# Altium PCB Node_PCB_V2.PcbDoc
Units mm, origin at the board's own origin, x right, y up, seen from the top; angles counter-clockwise.
Board outline 82.25 x 80.25 mm, 2 copper layers (Top Layer, Bottom Layer); 53 components, 55 nets, 202 pads, 35 vias.
Unrouted connection lines stored in the file: 1.
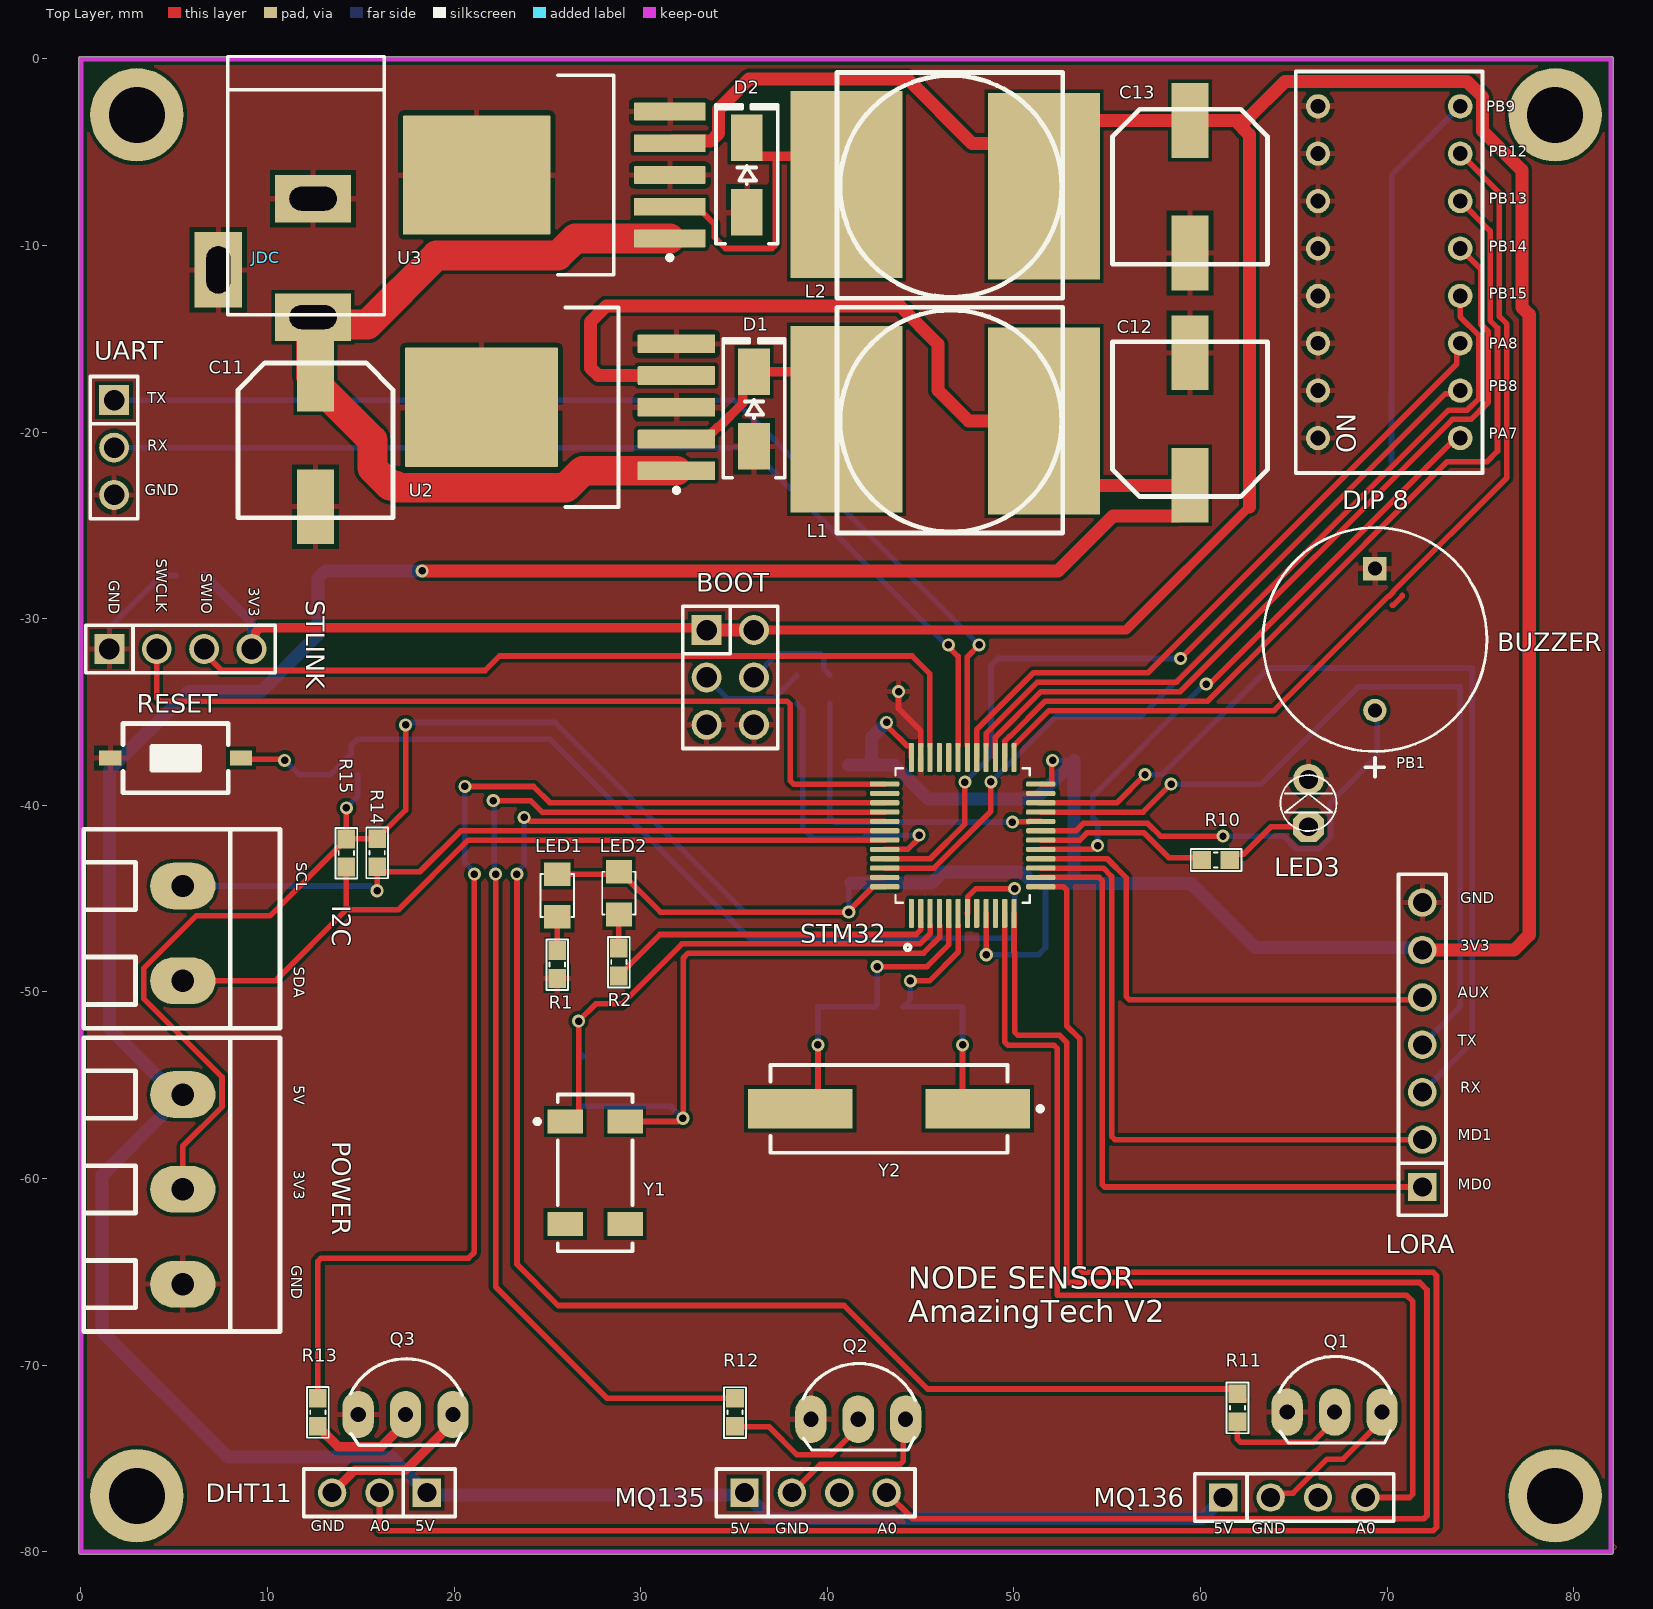
[diagram p0: Top Layer view]
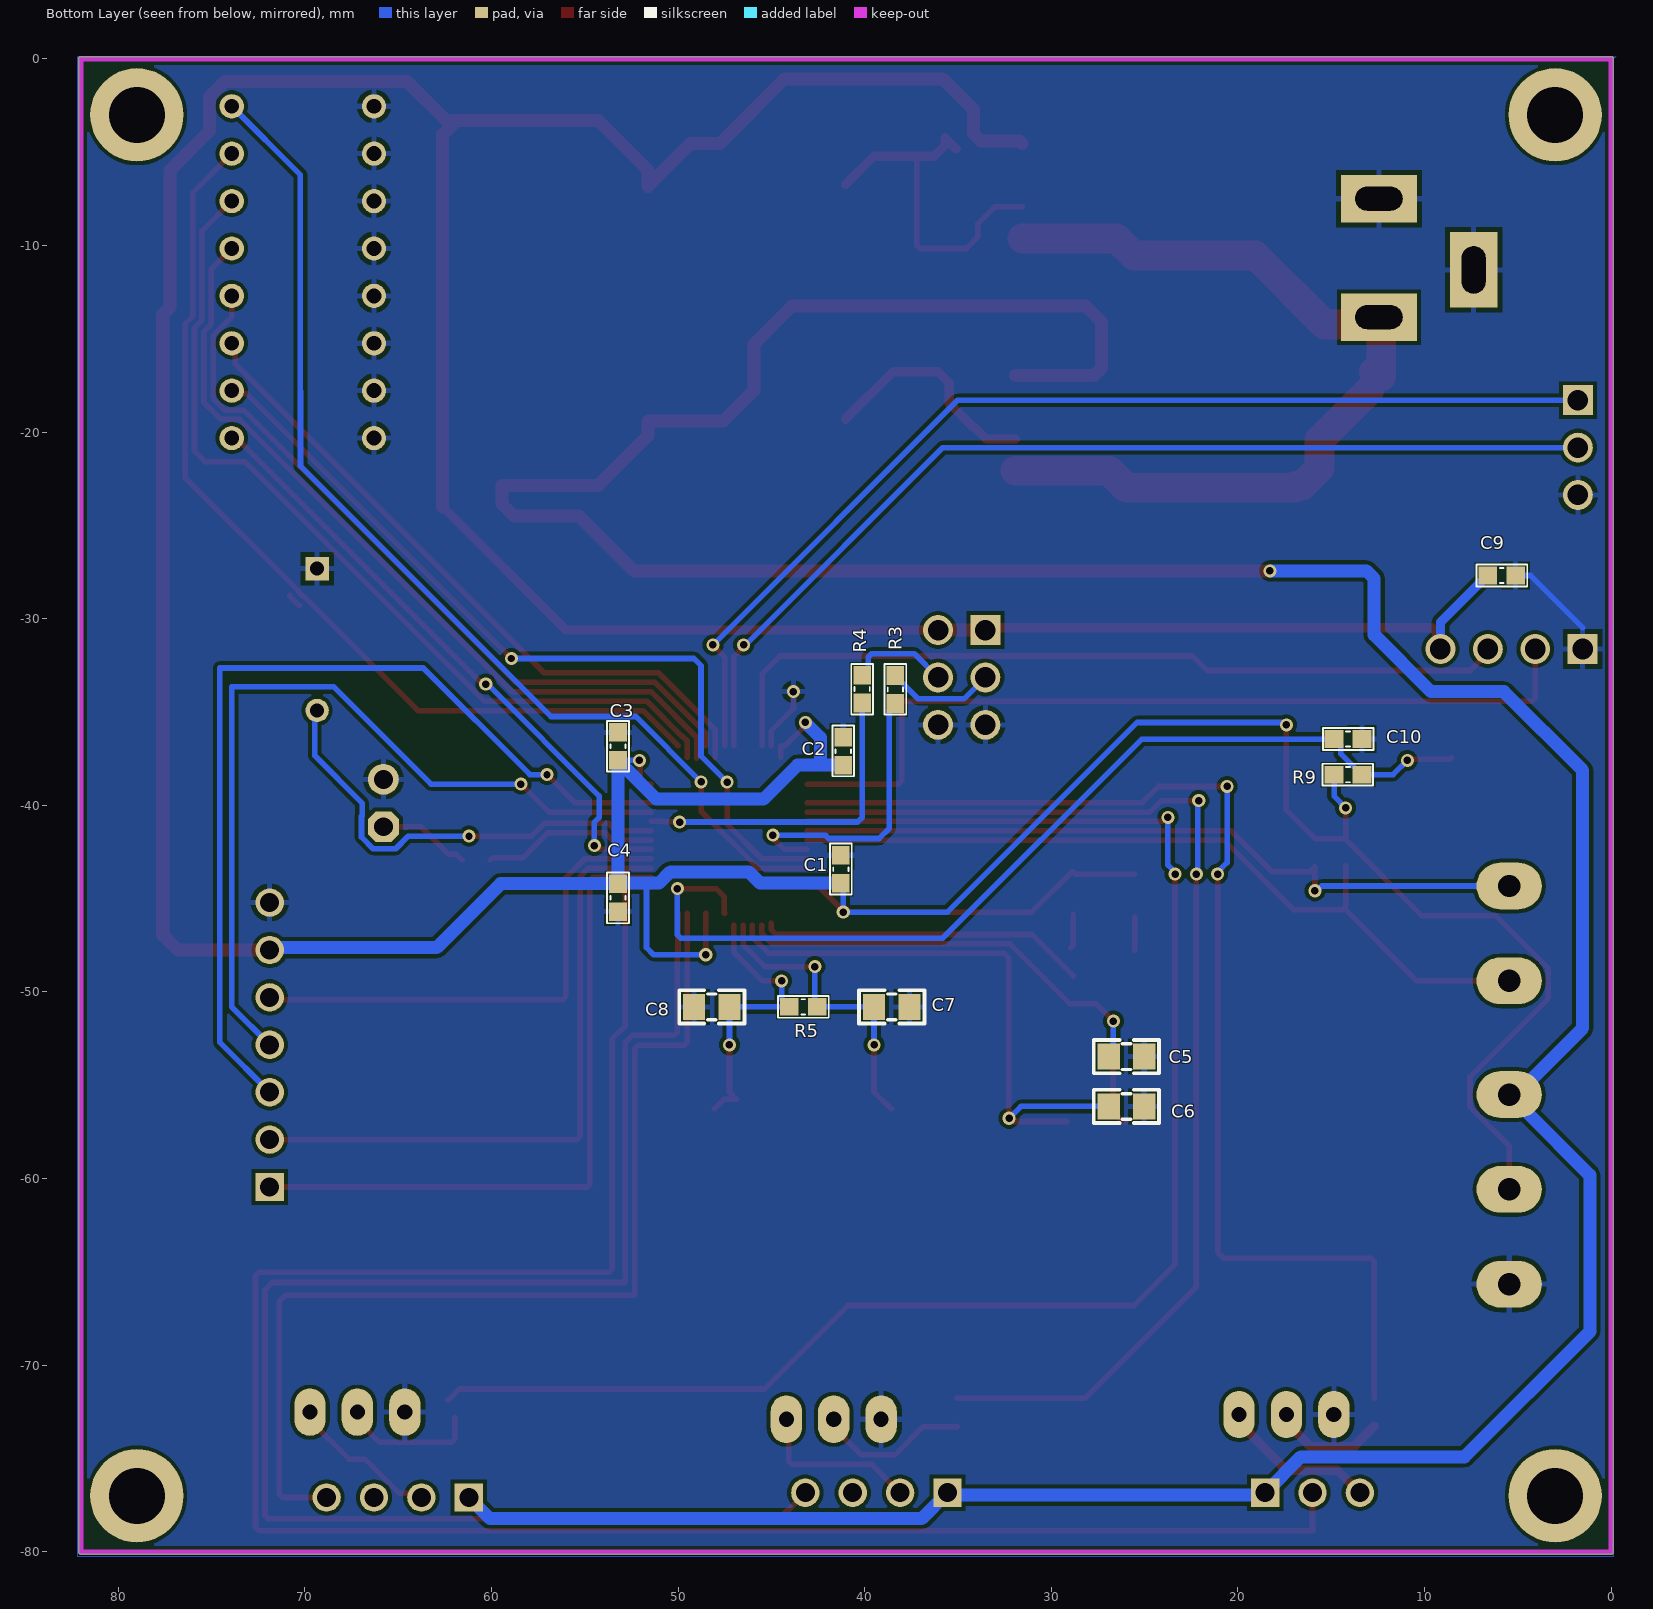
[diagram p1: Bottom Layer view, seen from below]

## Layer stack, top to bottom
Top Solder: solder mask 0.0102, Solder Resist, Dk 3.5
Top Layer: signal copper 0.0356
Dielectric 1: dielectric 0.32, FR-4, Dk 4.8
Bottom Layer: signal copper 0.0356
Bottom Solder: solder mask 0.0102, Solder Resist, Dk 3.5

## Board outline
0,-80.127 cw(c0,-80) -0.127,-80 -0.127,0 cw(c0,0) 0,0.127 82,0.127 cw(c82,0) 82.127,0 82.127,-80 cw(c82,-80) 82,-80.127

## Design rules (kind name [scope] priority, off if disabled: settings)
Clearance [All] p1: gap=0.2 ignorepadtopadclearanceinfootprint=FALSE
PolygonConnect [All] p1: connectstyle=Relief reliefconductorwidth=0.3 reliefentries=4 polygonreliefangle="90 Angle" airgapwidth=0.254
RoutingVias RoutingVias_1 [All] p1: holewidth=0.4 width=0.7 viastyle="Through Hole" minholewidth=0.4 minwidth=0.7 maxholewidth=0.4 maxwidth=0.7
SolderMaskExpansion [All] p1: expansion=0.102 istentingtop=FALSE
Width GND [InNet('GND')] p1: maxlimit=1.6 minlimit=0.3 preferedwidth=1.2
Width 3V3 [InNet('3V3')] p2: maxlimit=1.6 minlimit=0.3 preferedwidth=0.3
Width 5V [InNet('5V')] p3: maxlimit=1.6 minlimit=0.3 preferedwidth=0.3
Width 12V [InNet('12V')] p4: maxlimit=2 minlimit=1.2 preferedwidth=1.6
Width [All] p5: maxlimit=0.5 minlimit=0.3 preferedwidth=0.5
30 further rules are at their usual default settings.

## Components (designator, comment, footprint, x,y, rotation, side; value= is the part's Value field where it differs from the comment)
BOOT "Header 3X2" "JP 2x3 DT" 34.798,-33.147 r270 top (schematic designator P1)
BUZZER "Buzzer" FP-MCKPX-G1203A-K4056-MFG 69.342,-31.115 r270 top (schematic designator LS1)
C1 "104" "tu 0603" 41.275,-43.422 r90 bottom
C2 "104" "tu 0603" 41.148,-37.096 r90 bottom
C3 "104" "tu 0603" 53.213,-36.842 r90 bottom
C4 "104" "tu 0603" 53.213,-44.946 r270 bottom
C5 "20pF" "tu 0805" 25.978,-53.464 r180 bottom
C6 "20pF" "tu 0805" 25.978,-56.131 r180 bottom
C7 "20pF" "tu 0805" 38.551,-50.797 r180 bottom
C8 "20pF" "tu 0805" 48.19,-50.803 r0 bottom
C9 "104, 0603" "tu 0603" 5.867,-27.686 r180 bottom
C10 "105, 0603" "tu 0603" 14.097,-36.449 r180 bottom
C11 "100uF" "tu nhom 8 (f)" 12.573,-20.441 r270 top
C12 "100uF" "tu nhom 8 (f)" 59.436,-19.304 r90 top
C13 "100uF" "tu nhom 8 (f)" 59.436,-6.852 r270 top
D1 "SS34" "DIODE SMA" 36.068,-18.764 r90 top
D2 "SS34" "DIODE SMA" 35.687,-6.223 r90 top
DHT11 "DHT11" "JP 1x3 CT" 18.542,-76.835 r180 top (schematic designator JP3)
"DIP 8" "418117270908" 418117270908 70.104,-11.43 r90 top (schematic designator SW1)
I2C "KF128-2P" KF128-5.08-2P 5.461,-44.323 r270 top (schematic designator J1)
JDC "Jac DC" DC-IN 9.906,-10.668 r270 top
L1 "100uH - 3A SMD" "Cuon Cam 12x12x10" 52.621,-25.404 r90 top
L2 "100uH - 3A SMD" "Cuon Cam 12x12x10" 52.621,-12.831 r90 top
LED1 "LED 0805" LED-0805-Red 25.527,-43.688 r270 top
LED2 "LED 0805" LED-0805-Green 28.829,-43.561 r270 top
LED3 "LED 3mm" LED-3MM-RED 65.786,-41.148 r90 top
LORA "LORA" "JP 1x7 CT" 71.882,-60.452 r90 top (schematic designator JP5)
MQ135 "MQ136" "JP 1x4 CT" 35.56,-76.835 r0 top (schematic designator JP2)
MQ136 "MQ135" "JP 1x4 CT" 61.214,-77.089 r0 top (schematic designator JP1)
POWER "KF128-3P" KF128-5.08-3P 5.461,-55.499 r270 top (schematic designator J2)
Q1 "?" TO92 67.183,-72.517 r0 top value=C9014
Q2 "?" TO92 41.656,-72.898 r0 top value=C9014
Q3 "?" TO92 17.399,-72.644 r0 top value=C9014
R1 "510R" "tro smd 0603" 25.527,-48.526 r270 top
R2 "510R" "tro smd 0603" 28.829,-48.399 r270 top
R3 "100k" "tro smd 0603" 38.354,-33.794 r90 bottom
R4 "100k" "tro smd 0603" 40.132,-33.77 r270 bottom
R5 "1M" "tro smd 0603" 43.295,-50.8 r180 bottom
R9 "10k, 0603" "tro smd 0603" 14.097,-38.354 r0 bottom
R10 "510R" "tro smd 0603" 60.821,-42.926 r0 top
R11 "220R" "tro smd 0603" 61.976,-72.275 r270 top
R12 "220R" "tro smd 0603" 35.052,-72.529 r270 top
R13 "220R" "tro smd 0603" 12.7,-72.517 r270 top
R14 "1.5k" "tro smd 0603" 15.875,-42.533 r270 top
R15 "1.5k" "tro smd 0603" 14.224,-42.557 r270 top
RESET "Nut Nhan 2 Chan SMD 3x6x2.5" "Nut Nhan 2 Chan SMD 3x6x2.5" 5.08,-37.465 r0 top (schematic designator BT1)
STLINK "SWD" "JP 1x4 DT" 1.524,-31.623 r0 top (schematic designator P2)
STM32 "STM32F103C8T6" QFP50P900X900X160-48N 47.255,-41.612 r90 top (schematic designator U1)
U2 "LM2576S-5.0/NOPB" KTT0005B_N 25.663,-18.669 r180 top
U3 "LM2576SX-3.3/NOPB" KTT0005B_L 25.359,-6.223 r180 top
UART "UART" "JP 1x3 DT" 1.778,-18.288 r270 top (schematic designator JP4)
Y1 "32.768K" FP-ABS25-MFG 27.559,-59.69 r270 top
Y2 "8MHz" ABRA-ABLS-14.7456MHZ-B2-T_V 43.307,-56.261 r180 top

## Footprints (in the part's own frame and the unit in brackets; to place one, negate y for a bottom-side part, rotate by r counter-clockwise, add the part's x,y. Pads: shape width x height; smd on the part's side, far side on the other; paste and mask are expansions set on the pad)
418117270908 [mm] "2.54 mm compact THT with raised actuator, 8p"
  round 1.3 hole 0.8: 1(-8.89,-3.81) 2(-6.35,-3.81) 3(-3.81,-3.81) 4(-1.27,-3.81) 5(1.27,-3.81) 6(3.81,-3.81) 7(6.35,-3.81) 8(8.89,-3.81) 9(8.89,3.81) 10(6.35,3.81) 11(3.81,3.81) 12(1.27,3.81) 13(-1.27,3.81) 14(-3.81,3.81) 15(-6.35,3.81) 16(-8.89,3.81)
  silkscreen extent -10.76,-5 10.76,5, body extent -10.66,-4.95 10.66,4.95, height 6.9
ABRA-ABLS-14.7456MHZ-B2-T_V [mm] "SMD, 2-Leads, Body 11.4x4.7mm"
  rect 5.6x2.1 smd: 1(-4.75,0) 2(4.75,0)
  silkscreen extent -8.23,-2.35 6.35,2.35, body extent -6.35,-2.35 6.35,2.35, height 4.16
"Cuon Cam 12x12x10" [mm] "Cuon Cam 12x12x10"
  rect 10x6 smd: 1(6.1,11.6) 2(6,1)
  silkscreen extent 0,0 12.1,12.1, body extent 0.1,-0.2 12.1,12.14, height 7.51
DC-IN [mil] "Jac DC input"
  rect 100x160 hole 50 slot 100 at 90 deg: 1(125,100) 2(-125,100)
  rect 160x100 hole 50 slot 100 at 0 deg: 3(25,-100)
  silkscreen extent -425,-80 120,250, body extent -410,-105 134,269, height 434
"DIODE SMA" [mm] "SMA"
  rect 2.5x1.7 smd: 1(-2,0) 2(2,0)
  silkscreen extent -3.68,-1.65 3.75,1.65, body extent -2.6,-1.37 2.6,1.37, height 2.4
FP-ABS25-MFG [mm]
  rect 1.3x1.9 smd paste+0 mask+0: 1(-2.75,-1.6) 2(2.75,-1.6) 3(2.75,1.6) 4(-2.75,1.6)
  silkscreen extent -4.2,-3.22 4.2,2, body extent -4.3,-2.65 4.3,2.65, height 0.25
FP-MCKPX-G1203A-K4056-MFG [mm]
  rect 1.25x1.25 hole 0.75 paste-1000 mask+0: 1(-3.8,0)
  round 1.25 hole 0.75 paste-1000 mask+0: 2(3.8,0)
  silkscreen extent -6,-6 7.35,6, body extent -6.1,-6.1 6.1,6.1, height 0.25
"JP 1x3 CT" [mm]
  rect 1.52x1.52 hole 1.02: 1(0,0)
  round 1.52 hole 1.02: 2(2.54,0) 3(5.08,0)
  silkscreen extent -1.52,-1.27 6.6,1.27, body extent -1.52,-1.25 6.6,1.25, height 8.51
"JP 1x3 DT" [mm]
  rect 1.6x1.6 hole 1.1: 1(0,0)
  round 1.6 hole 1.1: 2(2.54,0) 3(5.08,0)
  silkscreen extent -1.27,-1.27 6.35,1.27, body extent -1.27,-1.27 6.35,1.27, height 8.54
"JP 1x4 CT" [mm]
  rect 1.52x1.52 hole 1.02: 1(0,0)
  round 1.52 hole 1.02: 2(2.54,0) 3(5.08,0) 4(7.62,0)
  silkscreen extent -1.52,-1.27 9.14,1.27, body extent -1.52,-1.25 9.14,1.25, height 8.51
"JP 1x4 DT" [mm] "4 pins, 1 row, straight, gold plating"
  rect 1.6x1.6 hole 1.1: 1(0,0)
  round 1.6 hole 1.1: 2(2.54,0) 3(5.08,0) 4(7.62,0)
  silkscreen extent -1.27,-1.27 8.89,1.27, body extent -1.27,-1.27 8.89,1.27, height 8.54
"JP 1x7 CT" [mm] "7 row, straight, gold plating"
  rect 1.52x1.52 hole 1.02: 1(0,0)
  round 1.52 hole 1.02: 2(2.54,0) 3(5.08,0) 4(7.62,0) 5(10.16,0) 6(12.7,0) 7(15.24,0)
  silkscreen extent -1.52,-1.27 16.76,1.27, body extent -1.52,-1.25 16.76,1.25, height 8.51
"JP 2x3 DT" [mm]
  rect 1.6x1.6 hole 1.1: 1(-2.54,-1.27)
  round 1.6 hole 1.1: 2(0,-1.27) 3(2.54,-1.27) 4(2.54,1.27) 5(0,1.27) 6(-2.54,1.27)
  silkscreen extent -3.81,-2.54 3.81,2.54, body extent -3.81,-2.54 3.81,2.54, height 8.55
KF128-5.08-2P [mm] "ÂÝ¶¤Ê½½ÓÏß¶Ë×Ó£¬½Å¾à5.08mm"
  oval 2.5x3.5 hole 1.2: 1(0,0) 2(5.08,0)
  silkscreen extent -3.05,-5.31 7.62,5.21, body extent -3.05,-5.38 7.61,5.12, height 14.15
KF128-5.08-3P [mm] "ÂÝ¶¤Ê½½ÓÏß¶Ë×Ó£¬½Å¾à5.08mm"
  oval 2.5x3.5 hole 1.2: 1(0,0) 2(5.08,0) 3(10.16,0)
  silkscreen extent -3.05,-5.31 12.7,5.21, body extent -3.05,-5.38 12.69,5.12, height 14.15
KTT0005B_L [mm] "DPAK, 5-Leads, Body 10.65x9.65mm, Pitch 1.7mm, IPC High Density"
  rrect11% 3.85x0.95 smd: 1(-6.2,3.4) 2(-6.2,1.7) 3(-6.2,0) 4(-6.2,-1.7) 5(-6.2,-3.4)
  rrect2% 7.9x6.4 smd: 6(4.15,0)
  silkscreen extent -6.33,-5.35 -0.2,5.35, body extent -3.2,-5.32 6.45,5.33, height 4.83
KTT0005B_N [mm] "DPAK, 5-Leads, Body 10.65x9.65mm, Pitch 1.7mm, IPC Medium Density"
  rrect10% 4.15x1 smd: 1(-6.25,3.4) 2(-6.25,1.7) 3(-6.25,0) 4(-6.25,-1.7) 5(-6.25,-3.4)
  rrect2% 8.2x6.4 smd: 6(4.2,0)
  silkscreen extent -6.38,-5.35 -0.3,5.35, body extent -3.15,-5.32 6.5,5.33, height 4.83
LED-3MM-RED [mil]
  oct 65x65 hole 40: 1(0,0)
  round 65 hole 40: 2(100,0)
  silkscreen extent -9,-59 109,59, body extent -27,-77 117,80, height 181
LED-0805-Green [mil]
  rect 50x55 smd: 1(0,0) 2(90,0)
  silkscreen extent 0,-35 90,35, body extent 5,-25 85,25, height 43
LED-0805-Red [mil]
  rect 50x55 smd: 1(0,0) 2(90,0)
  silkscreen extent 0,-35 90,35, body extent 5,-25 85,25, height 43
"Nut Nhan 2 Chan SMD 3x6x2.5" [mm] "Switch SMD type"
  rect 1.2x0.8 smd: 1(-3.5,0) 2(3.5,0)
  silkscreen extent -2.82,-1.85 2.82,1.85, body extent -3.05,-1.85 3.05,1.85, height 2.5
QFP50P900X900X160-48N [mm]
  rrect50% 1.56x0.28 smd: 1(-4.18,2.75) 2(-4.18,2.25) 3(-4.18,1.75) 4(-4.18,1.25) 5(-4.18,0.75) 6(-4.18,0.25) 7(-4.18,-0.25) 8(-4.18,-0.75) 9(-4.18,-1.25) 10(-4.18,-1.75) 11(-4.18,-2.25) 12(-4.18,-2.75) 25(4.18,-2.75) 26(4.18,-2.25) 27(4.18,-1.75) 28(4.18,-1.25) 29(4.18,-0.75) 30(4.18,-0.25) 31(4.18,0.25) 32(4.18,0.75) 33(4.18,1.25) 34(4.18,1.75) 35(4.18,2.25) 36(4.18,2.75)
  rrect50% 0.28x1.56 smd: 13(-2.75,-4.18) 14(-2.25,-4.18) 15(-1.75,-4.18) 16(-1.25,-4.18) 17(-0.75,-4.18) 18(-0.25,-4.18) 19(0.25,-4.18) 20(0.75,-4.18) 21(1.25,-4.18) 22(1.75,-4.18) 23(2.25,-4.18) 24(2.75,-4.18) 37(2.75,4.18) 38(2.25,4.18) 39(1.75,4.18) 40(1.25,4.18) 41(0.75,4.18) 42(0.25,4.18) 43(-0.25,4.18) 44(-0.75,4.18) 45(-1.25,4.18) 46(-1.75,4.18) 47(-2.25,4.18) 48(-2.75,4.18)
  silkscreen extent -6.15,-3.6 3.6,3.6, body extent -4.5,-4.5 4.5,4.5, height 1.6
TO92 [mil] "TO-92"
  oval 66x100 hole 32: 1(-100,0) 2(0,0) 3(100,0)
  silkscreen extent -117,-65 120,118, body extent -109,-66 109,95, height 245
"tro smd 0603" [mm] "Chip Capacitor, 2-Leads, Body 1,60x0,80mm, IPC Medium Density"
  rect 1x0.95 smd mask+0.076: 1(-0.75,0) 2(0.75,0)
  silkscreen extent -1.35,-0.58 1.37,0.58, body extent -0.82,-0.42 0.82,0.43, height 0.44
"tu 0603" [mm] "Chip Capacitor, 2-Leads, Body 1,60x0,80mm, IPC Medium Density"
  rect 1x0.95 smd mask+0.076: 1(-0.75,0) 2(0.75,0)
  silkscreen extent -1.35,-0.58 1.37,0.58, body extent -0.8,-0.4 0.8,0.4, height 0.9
"tu 0805" [mm] "Compoment SMD 80x50mil"
  rect 1.2x1.4 smd: 1(-0.946,-0.003) 2(0.954,-0.003)
  silkscreen extent -1.75,-0.89 1.75,0.89, body extent -1.01,-0.64 1.01,0.63, height 0.61
"tu nhom 8 (f)" [mm]
  rect 4x2 smd: 1(-3.55,0) 2(3.55,0)
  silkscreen extent -4.15,-4.15 4.15,4.15, body extent -4.85,-4.25 4.85,4.25, height 10.5

## Part data
BOOT: library part "JP 2x3 2.54 Duc Thang", "Cắm", Chung_Loai=Cắm, Don_Vi=Con, Ma_Hang=MH002686, Ten_Linh_Kien="Jump Đôi Đực 2.54MM 2x40P Thẳng 11MM"
BUZZER: library part CMP-12433-000001-1, "MAGNETIC BUZZER AND TRANSDUCER - More Details", Current=30mA, Frequency=2300Hz, Manufacturer="Multicomp Pro", Manufacturer Part Number=MCKPX-G1203A-K4056, Max Supply Voltage=5V, Min Supply Voltage=2V, Operating Supply Voltage=3V, Package=0, Temperature="-20°C to +70°C", Temperature Range High=+70°C, Temperature Range Low=-20°C, Automotive=No, Category=Speak, ComponentLink2Description=Datasheet, ComponentLink2URL=http://www.farnell.com/datasheets/1498149.pdf?_ga=2.17855225.1157923166.1572356775-536200964.1569240579, Device Class L1=Electromechanical, Device Class L2="Audio Products", Device Class L3=Buzzers, Height=9.5mm, Lead Free=Yes, Octopart=https://octopart.com/mckpx-g1203a-k4056-multicomp-12157154, RoHS=TRUE, Standoff Height=0.5mm
C1 C2 C3 C4 C9: library part "Tu 0603 104 50V 10%", "Dán", Chung_Loai=Dán, Don_Vi=Con, Ma_Hang=MH004568, So_Chan=2, Ten_Linh_Kien="Tụ 0603 104-100nF 10% 50V"
C5 C6 C7 C8: library part "Tu 0805 20pF 50V 10%", "Dán", Chung_Loai=Dán, Don_Vi=Con, Ma_Hang=MH004558, So_Chan=2, Ten_Linh_Kien="Tụ 0805 20P 10% 50V"
C10: library part "Tu 0603 105 16V 20%", "Dán", Chung_Loai=Dán, Don_Vi=Con, Ma_Hang=MH004574, So_Chan=2, Ten_Linh_Kien="Tụ 0603 105-1uF 20% 16V"
C11 C12 C13: library part "Tu Nhom 100uF 50V", "Dán", Chung_Loai=Dán, Don_Vi=Con, Ma_Hang=MH002223, So_Chan=2, Ten_Linh_Kien="Tụ Nhôm 100uF 50V 8x10.2MM"
D1 D2: library part "Diode SS34 ( 1N5822 )", "Dán", Chung_Loai=Dán, Don_Vi=Con, Ma_Hang=MH002104, Ten_Linh_Kien="Diode SS34 3A 40V SMA ( 1N5822 SS34A)"
DHT11: library part "JP 1x3 2.54 Cai Thang", "Cắm", Chung_Loai=Cắm, Don_Vi=Con, Ma_Hang=MH004006, Ten_Linh_Kien="Jump Đơn Cái 2.54MM 1x20P Thẳng"
"DIP 8": "WS-DITV Compact THT Dip Switch, Raised Actuator, pitch 2.54mm, 8p", Manufacturer="Wurth Elektronik", Operating Temperature Max=85°C, Operating Temperature Min=-40°C, Rated Current Non-Switching=100mA, Rated Current Switching=25mA, Rated Voltage Non-Switching=50VDC, Rated Voltage Switching=24VDC, Actuator Type="Raise Type", Category="Dip Switches", ComponentLink1Description="Website Link", ComponentLink1URL=https://www.we-online.com/redexpert/article/418117270908?ad, ComponentLink2Description="Datasheet Link", ComponentLink2URL=https://www.we-online.com/redexpert/spec/418117270908?ad, Contact Material="Copper Alloy", Contact Plating=Gold, Manufacturer Part Number=418117270908, Match Code=WS-DITV, Mount="Through Hole", Number of Poles=8, Operation Force=800g, Packaging=Tube, Pitch=2.54mm
JDC: library part DCIN, "Jac DC input"
L1 L2: library part "CUON CAM 100uH SMD", "Dán", Chung_Loai=Dán, Don_Vi=Con, Ten_Linh_Kien="Cuộn Cảm 100uH 7x7x4MM CD74"
LED1: library part "LED 0805 Do", "Dán", Chung_Loai=Dán, Don_Vi=Con, Ma_Hang=MH000897, Ten_Linh_Kien="LED 0805 Màu Đỏ (Red)"
LED2: library part "LED 0805 Xanh La", "Dán", Chung_Loai=Dán, Don_Vi=Con, Ma_Hang=MH002326, Ten_Linh_Kien="LED 0805 Màu Xanh Lá (Green)"
LED3: library part "LED 3mm Do", "Cắm", Chung_Loai=Cắm, Don_Vi=Con, Ma_Hang=MH003892, Ten_Linh_Kien="Led 3MM Phủ Đỏ (10c)"
LORA: library part "JP 1x7 2.54 Cai Thang", "Cắm", Chung_Loai=Cắm, Don_Vi=Con, Ma_Hang=MH004006, Ten_Linh_Kien="Jump Đơn Cái 2.54MM 1x20P Thẳng"
MQ135 MQ136: library part "JP 1x4 2.54 Cai Thang", "Cắm", Chung_Loai=Cắm, Don_Vi=Con, Ma_Hang=MH004006, Ten_Linh_Kien="Jump Đơn Cái 2.54MM 1x20P Thẳng"
Q1 Q2 Q3: library part "Trans 2N3904", "NPN transistor EBC"
R1 R2 R10: library part "Tro 0603 5% 510R", "Dán", Chung_Loai=Dán, Don_Vi=Con, Ma_Hang=MH007667, So_Chan=2, Ten_Linh_Kien="Trở 0603 5% 510R"
R3 R4: library part "Tro 0603 5% 100k", "Dán", Chung_Loai=Dán, Don_Vi=Con, Ma_Hang=MH006314, So_Chan=2, Ten_Linh_Kien="Trở 0603 5% 100k"
R5: library part "Tro 0603 5% 1M", "Dán", Chung_Loai=Dán, Don_Vi=Con, Ma_Hang=MH006909, So_Chan=2, Ten_Linh_Kien="Trở 0603 5% 1M"
R9: library part "Tro 0603 1% 10k", "Dán", Chung_Loai=Dán, Don_Vi=Con, Ma_Hang=MH006333, So_Chan=2, Ten_Linh_Kien="Trở 0603 1% 10k"
R11 R12 R13: library part "Tro 0603 5% 220R", "Dán", Chung_Loai=Dán, Don_Vi=Con, Ma_Hang=MH006322, So_Chan=2, Ten_Linh_Kien="Trở 0603 5% 220R"
R14 R15: library part "Tro 0603 5% 1.5k", "Dán", Chung_Loai=Dán, Don_Vi=Con, Ma_Hang=MH006313, So_Chan=2, Ten_Linh_Kien="Trở 0603 5% 1.5k"
STLINK: library part "JP 1x4 2.54 Duc Thang", "Cắm", Chung_Loai=Cắm, Don_Vi=Con, Ma_Hang=MH000903, Ten_Linh_Kien="Jump Đơn Đực 2.54MM 1x40P Thẳng 11MM"
STM32: "ARM® Cortex®-M3 STM32F1 Microcontroller IC 32-Bit 72MHz 64KB (64K x 8) FLASH 48-LQFP (7x7)", Package="LQFP-48 STMicroelectronics", Check_prices=https://www.snapeda.com/parts/STM32F103C8T6/STMicroelectronics/view-part/?ref=eda, MF=STMicroelectronics, MP=STM32F103C8T6, SnapEDA_Link=https://www.snapeda.com/parts/STM32F103C8T6/STMicroelectronics/view-part/?ref=snap
U2: library part CMP-0069-00114-3, "SIMPLE SWITCHER® 3A Step-Down Voltage Regulator, 5-pin TO-263, Pb-Free", Manufacturer="Texas Instruments", PackageTopMarking="NSUZXYTTE#*LM2576S*-5.0 P+", PowerWise=N, Code_JEDEC=MO-169-AB, ComponentLink1Description="Datasheet URL", ComponentLink1URL=http://www.ti.com/general/docs/lit/getliterature.tsp?genericPartNumber=LM2576&fileType=pdf, CompType=Switcher, PackageDescription="TO-263, Molded, .400 x .390 x .180in, 5 Lead, .067in Pitch, Surface Mount", PackageReference=KTT0005B, PinCount=5, RoHS=Y
U3: library part CMP-0069-00110-3, "SIMPLE SWITCHER® 3A Step-Down Voltage Regulator, 5-pin TO-263, Pb-Free", Manufacturer="Texas Instruments", PackageTopMarking="NSUZXYTTE#*LM2576S*-3.3 P+", PowerWise=N, Code_JEDEC=MO-169-AB, ComponentLink1Description="Datasheet URL", ComponentLink1URL=http://www.ti.com/general/docs/lit/getliterature.tsp?genericPartNumber=LM2576&fileType=pdf, CompType=Switcher, PackageDescription="TO-263, Molded, .400 x .390 x .180in, 5 Lead, .067in Pitch, Surface Mount", PackageReference=KTT0005B, PinCount=5, RoHS=Y
UART: library part "JP 1x3 2.54 Duc Thang", "Cắm", Chung_Loai=Cắm, Don_Vi=Con, Ma_Hang=MH000903, Ten_Linh_Kien="Jump Đơn Đực 2.54MM 1x40P Thẳng 11MM"
Y1: library part CMP-2000-05037-2, "CRYSTAL 32.7680KHZ 12.5PF SMD", Case/Package=SMD/SMT, ESR (Equivalent Series Resistance)=50kR, Frequency=32.768kHz, Frequency Tolerance=20ppm, Load Capacitance=12.5pF, Max Operating Temperature=85°C, Min Operating Temperature=-40°C, Operating Frequency="32.768 kHz", Package Quantity=1000, Depth=3.8mm, Height=0.098inch, Lead Free="Lead Free", Length=8mm, Mount="Surface Mount", Number of Pins=4, Packaging="Tape and Reel", Radiation Hardening=No, REACH SVHC="No SVHC", RoHS Compliant=Yes, Series=ABS25, Series Resistance=50kR, Termination=SMD/SMT, Tolerance=20ppm, Width=3.8mm
Y2: library part CMP-2000-05726-1, "Low Profile Crystal, 8.0 MHz, +/- 30 ppm, -20 to 70 degC, 2-Pin SMD, RoHS, Tape and Reel", Case Height=4.2mm, Case Length=11.4mm, Case Width=4.7mm, Frequency Stability=50PPM, Load Capacitance=18pF, Manufacturer=ABRACON, Operating Temperature Range=-20Cto+70C, Package / Case=HC-49/US, Package Description="2-Pin Surface Mount Device, Body 11.4 x 4.7 mm", Package Reference=ABLS-14.7456MHZ-B2-T, Tolerance=30PPM, Brand=ABRACON, Datasheet URL=http://www.abracon.com/Resonators/abls.pdf, Datasheet Version=04/2011, Dimensions=4.7mmWx11.4mmLx4.2mmH, ESR=80Ohms, Factory Pack Quantity=1000, Frequency=8MHz, Manufacturer URL=http://www.abracon.com/, Mounting Style=SMD/SMT, Mounting Technology=SurfaceMount, Package URL=http://www.abracon.com/Support/PackageDrawing/Resonators/ABLS-2D.pdf, Packaging=Reel, Product Category=Crystals, RoHS=Details, Series=ABLS, Termination Style=SMD/SMT, Type=LowProfileMicroprocessorCrystal
RESET: Ma_Hang=MH001036, Ten="Nút Nhấn 2 Chân 3x6x2.5MM SMD"

## Free pads (board coordinates)
  round 5 hole 3: 2(3,-77) 2(3,-3) 2(79,-77) 2(79,-3)

## Via types
v1: diameter 0.7, hole 0.4, Top Layer to Bottom Layer, 35 vias

## Nets (pads, with @x,y where several pads share a name; then routed paths per layer and width w, separated by ;. In a path a pad name is that pad's centre, name@x,y a point inside that pad or via, vN(x,y) a via of type N, cw(c..) or ccw(c..) an arc to the next point about the centre after c; other vN are vias at no path point)
3V3: BOOT.1 BOOT.6 C1.1 C2.1 C3.1 C4.1 C9.1 C13.1 L2.2 LED1.1 LED2.1 LORA.6 POWER.2 R9.2 R14.1 R15.1 STLINK.4 STM32.9 STM32.24 STM32.36 STM32.48 U3.4 | length 345.9
  Top Layer w0.3: POWER.2 5.461,-58.262 7.561,-56.162 7.561,-54.551 3.361,-50.351 3.361,-48.74 6.178,-45.923 10.133,-45.923 14.248,-41.808 14.248,-41.783 R14.1 17.399,-40.259 v1(17.399,-35.687) ; R15.1 v1(14.224,-40.132) ; LED1.1 28.702,-43.688 LED2.1 28.892,-43.561 31.051,-45.72 v1(41.148,-45.72) 41.148,-45.669 42.455,-44.362 STM32.48 ; v1(43.18,-35.56) 43.257,-35.637 43.257,-35.804 44.255,-36.802 44.495,-36.802 44.495,-37.422 STM32.36 ; STM32.9 48.509,-45.796 48.509,-48.001 v1(48.514,-48.006) ; STM32.24 52.022,-38.862 52.032,-38.852 52.032,-37.63 v1(52.07,-37.592)
  Top Layer w0.5: STLINK.4 9.354,-31.413 9.354,-30.722 9.597,-30.48 33.401,-30.48 BOOT.1 ; BOOT.6 56.007,-30.607 62.611,-24.003
  Top Layer w0.7: U3.4 31.684,-4.398 33.767,-4.398 34.177,-3.988 34.177,-2.7 35.806,-1.071 44.294,-1.071 47.746,-4.523 49.313,-4.523 L2.2 51.621,-5.952 54.271,-3.302 C13.1 61.849,-3.302 ; BOOT.1 BOOT.6 ; 62.611,-24.003 62.611,-4.064 61.849,-3.302 ; LORA.6 76.806,-47.752 77.614,-46.944 77.614,-13.707 77.216,-13.309 77.216,-5.969 75.114,-3.867 75.114,-2.043 74.273,-1.202 64.528,-1.202 62.428,-3.302 61.849,-3.302
  Bottom Layer w0.3: v1(14.224,-40.132) 14.847,-39.509 R9.2 ; v1(17.399,-35.687) 17.526,-35.56 25.4,-35.56 35.56,-45.72 v1(41.148,-45.72) 41.148,-44.299 C1.1 ; v1(48.514,-48.006) 51.308,-48.006 51.689,-47.625 51.689,-44.172 ; v1(52.07,-37.592) C3.1
  Bottom Layer w0.5: C9.1 6.642,-27.686 9.144,-30.188 STLINK.4 STLINK.4@9.144,-31.841 ; BOOT.1@33.401,-30.48 BOOT.1
  Bottom Layer w0.7: C2.1 42.374,-37.846 ; C1.1 45.6,-44.172 46.21,-43.562 50.411,-43.562 51.021,-44.172 51.689,-44.172 53.189,-44.172 C4.1 ; v1(43.18,-35.56) 42.374,-36.366 42.374,-37.846 ; C3.1 C3.1@53.213,-37.617 ; LORA.6@71.949,-47.625 62.932,-47.625 59.503,-44.196 C4.1 ; 42.374,-37.846 43.601,-37.846 45.413,-39.658 51.172,-39.658 C3.1@53.213,-37.617 ; C4.1 C3.1@53.213,-37.617
5V: C12.1 DHT11.1 L1.2 MQ135.1 MQ136.1 POWER.1 U2.4 | length 210.6
  Top Layer w0.7: v1(18.288,-27.432) 52.371,-27.432 55.299,-24.504 58.786,-24.504 59.436,-23.854 C12.1 54.271,-22.854 51.621,-20.204 L1.2 47.571,-19.404 45.933,-17.766 45.933,-15.282 43.894,-13.244 28.158,-13.244 27.305,-14.097 27.305,-16.559 27.715,-16.969 U2.4
  Bottom Layer w0.7: POWER.1@5.08,-55.499 1.524,-51.943 1.524,-38.129 5.744,-33.909 9.652,-33.909 12.7,-30.861 12.7,-27.842 13.11,-27.432 v1(18.288,-27.432) ; POWER.1 5.448,-55.499 4.617,-56.33 4.617,-56.343 1.143,-59.817 1.143,-68.199 7.859,-74.915 16.622,-74.915 DHT11.1 ; DHT11.1@18.284,-76.962 35.433,-76.962 MQ135.1 36.948,-78.223 60.08,-78.223 MQ136.1
12V: C11.1 JDC.1 U2.1 U3.1 | length 46.8
  Top Layer w1.6: C11.1@12.319,-17.024 12.319,-13.97 JDC.1 JDC.1@13.239,-14.028 ; C11.1 C11.1@12.7,-16.764 ; C11.1@12.966,-17.776 15.621,-20.431 15.621,-21.932 16.558,-22.869 16.831,-22.869 16.941,-22.979 25.985,-22.979 26.895,-22.069 U2.1 ; JDC.1@13.239,-14.224 15.367,-14.224 19.05,-10.541 25.573,-10.541 26.491,-9.623 U3.1
AUX: LORA.5 STM32.16 | length 27.7
  Top Layer w0.3: STM32.16 54.999,-42.862 56.007,-43.87 56.007,-50.243 56.183,-50.419 LORA.5@72.242,-50.419
BOOT0: R3.1 STM32.44 | length 15.6
  Top Layer w0.3: STM32.44 44.305,-42.362 44.843,-41.824 44.843,-41.671 v1(44.919,-41.594)
  Bottom Layer w0.3: R3.1 38.679,-34.869 38.679,-41.226 39.232,-41.779 41.929,-41.779 42.114,-41.594 v1(44.919,-41.594)
BOOT1: R4.2 STM32.20 | length 17.5
  Top Layer w0.3: v1(49.911,-40.894) 49.933,-40.872 50.805,-40.872 50.815,-40.862 STM32.20
  Bottom Layer w0.3: R4.2 40.132,-40.642 40.384,-40.894 v1(49.911,-40.894)
GND: "DIP 8.9" "DIP 8.10" "DIP 8.11" "DIP 8.12" "DIP 8.13" "DIP 8.14" "DIP 8.15" "DIP 8.16" BOOT.3 BOOT.4 BUZZER.1 C1.2 C2.2 C3.2 C4.2 C5.2 C6.2 C7.2 C8.2 C9.2 C10.2 C11.2 C12.2 C13.2 D1.1 D2.1 JDC.2 JDC.3 LED3.2 LORA.7 POWER.3 Q1.1 Q2.1 Q3.1 R1.2 RESET.1 STLINK.1 STM32.8 STM32.23 STM32.35 STM32.47 U2.3 U2.5 U2.6 U3.3 U3.5 U3.6 UART.3 | length 8.1
  Top Layer w0.3: v1(43.815,-33.909) 43.815,-34.82 44.995,-36 STM32.35@44.995,-36.802
  Bottom Layer w0.3: 1.524,-30.48 4.318,-27.686 C9.2
MD0: LORA.1 STM32.14 | length 36.9
  Top Layer w0.3: STM32.14 54.561,-43.862 54.737,-44.038 54.737,-60.325 54.864,-60.452 LORA.1
MD1: LORA.2 STM32.15 | length 34.6
  Top Layer w0.3: STM32.15 54.792,-43.362 55.237,-43.807 55.237,-57.736 55.413,-57.912 LORA.2
NetD1_2: D1.2 L1.1 U2.2 | length 12.3
  Top Layer w0.5: U2.2 33.488,-20.369 34.128,-19.729 34.191,-19.729 35.468,-18.452 35.468,-17.364 D1.2 38.481,-16.764 L1.1
NetD2_2: D2.2 L2.1 U3.2 | length 19.3
  Top Layer w0.3: U3.2 33.009,-7.923 33.939,-8.853 33.939,-9.555 34.544,-10.16 37.035,-10.16 37.211,-9.984 37.211,-5.223
  Top Layer w0.5: D2.2@35.087,-4.823 D2.2 35.687,-4.623 36.287,-5.223 37.211,-5.223 39.513,-5.223 L2.1
NetJP1_2: MQ136.2 Q1.3 | length 8.3
  Top Layer w0.3: MQ136.2 63.987,-76.856 64.958,-76.856 66.779,-75.034 67.638,-75.034 69.723,-72.949 Q1.3
  Bottom Layer w0.5: Q1.3@69.596,-72.644 Q1.3
NetJP2_2: MQ135.2 Q2.3 | length 9.3
  Top Layer w0.3: MQ135.2 39.624,-75.311 43.903,-75.311 44.078,-75.135 44.078,-73.016 Q2.3
  Bottom Layer w0.3: MQ135.2 MQ135.2@38.43,-76.835
NetJP3_3: DHT11.3 Q3.3 | length 8.5
  Top Layer w0.5: DHT11.3 14.672,-75.625 17.39,-75.625 19.939,-73.076 Q3.3
NetLED1_2: LED1.2 R1.1 | length 1.8
  Top Layer w0.3: R1.1 LED1.2
NetLED2_2: LED2.2 R2.1 | length 1.8
  Top Layer w0.3: LED2.2 28.829,-47.498 R2.1@28.956,-47.625
NetLED3_1: LED3.1 R10.2 | length 5
  Top Layer w0.3: R10.2 61.866,-42.631 62.287,-42.631 63.77,-41.148 LED3.1
NetP1_2: BOOT.2 R3.2 | length 5.8
  Bottom Layer w0.3: BOOT.2 34.678,-34.297 36.569,-34.297 36.576,-34.29 37.133,-34.29 38.354,-33.069 R3.2
NetP1_5: BOOT.5 R4.1 | length 5.4
  Bottom Layer w0.3: BOOT.5 37.338,-31.877 39.631,-31.877 39.807,-32.053 39.807,-32.695 R4.1
NetQ1_2: Q1.2 R11.2 | length 7.4
  Top Layer w0.3: R11.2@61.976,-72.796 61.976,-73.961 62.152,-74.137 65.995,-74.137 67.183,-72.949 Q1.2
NetQ2_2: Q2.2 R12.2 | length 8.3
  Top Layer w0.3: R12.2 35.052,-73.304 36.886,-73.304 38.385,-74.803 40.183,-74.803 41.656,-73.33 Q2.2
NetQ3_2: Q3.2 R13.2 | length 6.1
  Top Layer w0.5: R13.2 12.7,-73.292 13.772,-74.364 16.111,-74.364 17.399,-73.076 Q3.2
OSCIN: C7.1 R5.2 STM32.5 Y2.2 | length 16.5
  Top Layer w0.3: Y2.2 38.597,-56.261 39.497,-55.361 v1(39.497,-52.832) ; v1(42.672,-48.641) 45.339,-48.641 46.515,-47.465 STM32.5@46.515,-46.422
  Bottom Layer w0.3: v1(39.497,-52.832) C7.1 R5.2 42.672,-50.673 v1(42.672,-48.641)
OSCOUT: C8.1 R5.1 STM32.6 Y2.1 | length 15.9
  Top Layer w0.3: v1(44.45,-49.403) 45.466,-49.403 47.015,-47.854 STM32.6@47.015,-46.422 ; v1(47.244,-52.832) 47.244,-55.372 46.863,-55.753 47.549,-55.753 Y2.1
  Bottom Layer w0.3: R5.1 R5.1@44.07,-50.8 ; v1(44.45,-49.403) 44.45,-50.395 44.395,-50.45 44.395,-50.475 R5.1@44.07,-50.8 ; v1(47.244,-52.832) C8.1 R5.1@44.07,-50.8
PA0: STM32.10
PA1: MQ136.4 STM32.11 | length 55.2
  Top Layer w0.3: STM32.11 49.505,-52.675 49.691,-52.86 52.148,-52.86 52.324,-53.036 52.324,-66.245 71.023,-66.245 71.374,-66.597 71.374,-76.913 71.198,-77.089 MQ136.4
PA2: MQ135.4 STM32.12 | length 83.4
  Top Layer w0.3: MQ135.4 44.577,-78.232 71.96,-78.232 72.136,-78.056 72.136,-65.962 71.744,-65.57 52.832,-65.57 52.832,-52.705 52.448,-52.321 52.2,-52.321 52.197,-52.324 50.214,-52.324 50.038,-52.148 50.038,-47.879 50.005,-47.846 STM32.12
PA3: DHT11.2 STM32.13 | length 113.6
  Top Layer w0.3: DHT11.2 16.002,-78.867 72.468,-78.867 72.644,-78.691 72.644,-65.2 72.468,-65.024 53.691,-65.024 53.516,-64.848 53.516,-52.5 52.832,-51.816 52.832,-44.538 52.656,-44.362 STM32.13
PA7: "DIP 8.1" STM32.17 | length 33.8
  Top Layer w0.3: STM32.17 54.177,-42.362 54.377,-42.162 v1(54.483,-42.162) ; v1(60.303,-33.506) 60.38,-33.43 60.566,-33.43 73.676,-20.32 73.914,-20.32
  Bottom Layer w0.3: v1(54.483,-42.162) 54.483,-40.903 54.229,-40.649 54.229,-39.497 60.22,-33.506 v1(60.303,-33.506) ; 73.643,-20.32 73.914,-20.32
PA8: "DIP 8.3" STM32.29 | length 36.5
  Top Layer w0.3: STM32.29 48.005,-35.937 51.049,-32.893 57.176,-32.893 73.729,-16.34 73.729,-15.425 73.914,-15.24
PA11: STM32.32
PA12: STM32.33
PB0: R10.1 STM32.18 | length 9.4
  Top Layer w0.3: STM32.18 53.53,-41.862 53.93,-41.462 56.956,-41.462 58.293,-42.799 59.944,-42.799 R10.1
PB1: BUZZER.2 STM32.19 | length 24
  Top Layer w0.3: STM32.19 53.323,-41.362 53.723,-40.962 57.163,-40.962 57.853,-41.652 v1(61.203,-41.652)
  Bottom Layer w0.3: v1(61.203,-41.652) 61.207,-41.656 64.461,-41.656 65.129,-42.323 66.344,-42.323 66.961,-41.706 66.961,-40.59 66.929,-40.558 66.929,-39.878 69.469,-37.338 BUZZER.2@69.469,-35.296
PB3: R13.1 STM32.39 | length 64
  Top Layer w0.3: R13.1 12.7,-64.438 12.876,-64.262 20.779,-64.262 21.082,-63.959 v1(21.082,-43.688) ; v1(20.574,-38.989) 24.257,-38.989 25.13,-39.862 STM32.39
  Bottom Layer w0.3: v1(20.574,-38.989) 20.574,-43.072 21.082,-43.58 v1(21.082,-43.688)
PB4: R12.1 STM32.40 | length 62.6
  Top Layer w0.3: v1(22.098,-39.751) 24.104,-39.751 24.715,-40.362 STM32.40 ; v1(22.225,-43.688) 22.225,-65.798 28.206,-71.779 R12.1
  Bottom Layer w0.3: v1(22.098,-39.751) 22.162,-39.814 22.162,-43.624 v1(22.225,-43.688)
PB5: R11.1 STM32.41 | length 85.5
  Top Layer w0.3: v1(23.368,-43.688) 23.368,-64.594 25.576,-66.802 40.894,-66.802 45.37,-71.278 61.729,-71.278 R11.1 61.976,-71.537 62.301,-71.863 R11.1@62.339,-71.863 ; v1(23.749,-40.64) 23.857,-40.64 24.079,-40.862 STM32.41
  Bottom Layer w0.3: v1(23.368,-43.688) 23.368,-43.58 23.749,-43.199 v1(23.749,-40.64)
PB8: "DIP 8.2" STM32.45 | length 45.7
  Top Layer w0.3: STM32.45 45.515,-42.862 47.368,-41.009 v1(47.368,-38.758) ; v1(58.928,-32.131) 73.119,-17.94 73.754,-17.94 73.914,-17.78
  Bottom Layer w0.3: v1(47.368,-38.758) 48.768,-37.359 48.768,-32.512 49.149,-32.131 v1(58.928,-32.131) ; 73.723,-17.971 73.914,-17.78
PB9: "DIP 8.8" STM32.46 | length 57.8
  Top Layer w0.3: STM32.46 45.722,-43.362 48.767,-40.317 v1(48.767,-38.739)
  Bottom Layer w0.3: v1(48.767,-38.739) 52.264,-35.242 56.807,-35.242 70.231,-21.818 70.231,-17.797 70.239,-17.789 70.239,-6.215 73.914,-2.54
PB12: "DIP 8.7" STM32.25 | length 50.8
  Top Layer w0.3: STM32.25@50.005,-36.802 51.882,-34.925 63.936,-34.925 70.073,-28.788 70.112,-28.788 70.317,-28.583 70.317,-28.544 76.414,-22.447 76.414,-14.204 76.016,-13.806 76.016,-7.182 73.914,-5.08
PB13: "DIP 8.6" STM32.26 | length 47.9
  Top Layer w0.3: STM32.26 49.505,-36.558 49.761,-36.302 49.794,-36.302 51.679,-34.417 60.383,-34.417 64.389,-30.411 73.21,-21.59 75.34,-21.59 75.914,-21.016 75.914,-14.412 75.516,-14.014 75.516,-9.222 73.914,-7.62
PB14: "DIP 8.5" STM32.27 | length 43.8
  Top Layer w0.3: STM32.27@49.005,-37.465 49.005,-36.351 51.447,-33.909 58.911,-33.909 73.5,-19.32 74.495,-19.32 75.414,-18.401 75.414,-14.619 75.016,-14.221 75.016,-11.262 73.914,-10.16
PB15: "DIP 8.4" STM32.28 | length 40.4
  Top Layer w0.3: STM32.28@48.505,-36.802 48.505,-36.144 51.24,-33.409 51.554,-33.409 51.562,-33.401 58.712,-33.401 73.293,-18.82 74.288,-18.82 74.914,-18.194 74.914,-14.826 73.914,-13.826 73.914,-12.7
PC13: R2.2 STM32.2 | length 17.6
  Top Layer w0.3: R2.2 28.829,-49.124 31.031,-46.922 44.261,-46.922 44.749,-46.922 45.015,-46.656 STM32.2@45.015,-46.329
PC14: C5.1 STM32.3 Y1.1 | length 29
  Top Layer w0.3: Y1.1 26.17,-56.94 26.67,-56.44 26.67,-51.562 27.592,-50.64 28.989,-50.64 32.207,-47.422 44.956,-47.422 45.515,-46.863 STM32.3@45.515,-46.422
  Bottom Layer w0.3: v1(26.675,-51.562) 26.675,-53.218 C5.1
PC15: C6.1 STM32.4 Y1.4 | length 32.2
  Top Layer w0.3: Y1.4 31.979,-56.94 32.15,-56.769 v1(32.258,-56.769) 32.28,-56.747 32.28,-48.182 32.54,-47.922 45.163,-47.922 46.015,-47.07 STM32.4@46.015,-46.422
  Bottom Layer w0.3: C6.1 31.623,-56.134 v1(32.258,-56.769)
RESET: C10.1 R9.1 RESET.2 STM32.7 | length 53.4
  Top Layer w0.3: RESET.2 8.644,-37.529 10.858,-37.529 v1(10.922,-37.592) ; STM32.7 47.515,-45.782 47.515,-44.908 47.961,-44.462 v1(50.038,-44.462)
  Bottom Layer w0.3: v1(10.922,-37.592) 11.684,-38.354 R9.1 13.372,-38.354 14.497,-37.229 14.497,-36.774 14.822,-36.449 C10.1 25.146,-36.449 35.814,-47.117 49.862,-47.117 50.038,-46.941 v1(50.038,-44.462)
RXD1: STM32.31 UART.2 | length 54.7
  Top Layer w0.3: v1(46.482,-31.407) 46.482,-31.492 47.005,-32.015 STM32.31@47.005,-36.802
  Bottom Layer w0.3: UART.2 35.814,-20.828 46.393,-31.407 v1(46.482,-31.407)
RXD2: LORA.3 STM32.22 | length 49.9
  Top Layer w0.3: STM32.22 55.515,-39.862 v1(57.023,-38.354)
  Bottom Layer w0.3: v1(57.023,-38.354) 57.938,-38.354 63.653,-32.639 74.549,-32.639 74.549,-52.705 LORA.3
SCL: I2C.1 R14.2 STM32.42 | length 40
  Top Layer w0.3: v1(15.875,-44.577) R14.2 16.153,-43.561 18.161,-43.561 20.36,-41.362 STM32.42
  Bottom Layer w0.3: I2C.1 15.513,-44.323 15.767,-44.577 v1(15.875,-44.577)
SDA: I2C.2 R15.2 STM32.43 | length 43.1
  Top Layer w0.3: I2C.2 10.414,-49.403 14.312,-45.505 ; R15.2@14.224,-43.205 14.224,-45.417 14.4,-45.593 17.018,-45.593 20.749,-41.862 STM32.43
SWCLK: STLINK.2 STM32.37 | length 45.9
  Top Layer w0.3: STLINK.2 4.064,-34.241 4.24,-34.417 37.846,-34.417 38.022,-34.593 38.022,-38.686 38.198,-38.862 STM32.37
SWIO: STLINK.3 STM32.34 | length 44.1
  Top Layer w0.3: STLINK.3@6.609,-31.618 6.609,-31.832 7.55,-32.773 21.659,-32.773 22.435,-31.997 44.54,-31.997 45.485,-32.942 45.485,-35.288 45.495,-35.298 STM32.34@45.495,-36.802
TXD1: STM32.30 UART.1 | length 57.4
  Top Layer w0.3: STM32.30@47.505,-36.802 47.505,-32.035 v1(48.133,-31.407)
  Bottom Layer w0.3: UART.1 35.014,-18.288 v1(48.133,-31.407)
TXD2: LORA.4 STM32.21 | length 45.3
  Top Layer w0.3: STM32.21 56.92,-40.362 v1(58.42,-38.862)
  Bottom Layer w0.3: v1(58.42,-38.862) 63.237,-38.862 68.444,-33.655 73.914,-33.655 73.914,-50.8 LORA.4
pads on no net: MQ135.3 MQ136.3 STM32.1 STM32.38 Y1.2 Y1.3
copper on no net: | length 0.8
  Top Layer w0.3: 70.28,-29.288 70.319,-29.288 70.817,-28.79 70.817,-28.751

## Polygon pours and split planes (outlines as drawn)
GND on Bottom Layer "GND_L02_P004" (solid, remove dead copper, pour order 4): -0.127,0 -0.127,-79.883 0,-80.01 0.127,-79.883 82.296,-79.883 82.296,0 82.169,0.127 82.042,0
GND on Bottom Layer "NONET_L02_P000" (solid, remove dead copper, shelved, pour order 0): -0.254,0.127 -0.127,0 -0.127,-80.264 82.169,-80.264 82.169,0.127
GND on Top Layer "GND_L01_P005" (solid, remove dead copper, pour order 5): 0,-0.127 0,-80.01 82.042,-80.01 82.042,0.127 0.254,0.127
GND on Top Layer "NONET_L01_P001" (solid, remove dead copper, shelved, pour order 1): -0.127,0 0,-0.127 0,-80.01 82.042,-80.01 82.296,-79.756 82.042,-79.502 82.042,0.127 -0.127,0.127

## Keep-outs
Keep-Out Layer:
  lines w0.254: 0,-80 0,0 82,0 82,-80 0,-80

## Silkscreen, mask and mechanical layers (free items; w line width, h text height)
Top Overlay:
  text "PB9" at 75.311,-3.037 h1
  text "PB12" at 75.438,-5.461 h1
  text "PB13" at 75.438,-7.99 h1
  text "PB14" at 75.438,-10.541 h1
  text "PB15" at 75.438,-13.07 h1
  text "PA8" at 75.438,-15.737 h1
  text "PB8" at 75.438,-18.023 h1
  text "TX" at 3.556,-18.669 h1
  text "PA7" at 75.438,-20.574 h1
  text "RX" at 3.556,-21.209 h1
  text "GND" at 3.429,-23.611 h1
  text "SWCLK" at 3.821,-26.797 h1 r270
  text "SWIO" at 6.234,-27.559 h1 r270
  text "GND" at 1.281,-27.94 h1 r270
  text "3V3" at 8.774,-28.321 h1 r270
  text "PB1" at 70.485,-38.227 h1
  text "SCL" at 11.314,-43.053 h1 r270
  text "GND" at 73.914,-45.455 h1
  text "3V3" at 73.914,-47.995 h1
  text "SDA" at 11.187,-48.641 h1 r270
  text "AUX" at 73.787,-50.535 h1
  text "TX" at 73.787,-53.086 h1
  text "5V" at 11.187,-54.991 h1 r270
  text "RX" at 73.914,-55.626 h1
  text "MD1" at 73.787,-58.166 h1
  text "3V3" at 11.187,-59.563 h1 r270
  text "MD0" at 73.787,-60.822 h1
  text "GND" at 11.06,-64.643 h1 r270
  text "NODE SENSOR / AmazingTech V2" at 44.323,-67.691 h1.2
  text "GND" at 12.319,-79.11 h1
  text "A0" at 15.494,-79.11 h1
  text "5V" at 17.907,-79.11 h1
  text "5V" at 34.798,-79.237 h1
  text "GND" at 37.211,-79.237 h1
  text "A0" at 42.672,-79.237 h1
  text "5V" at 60.706,-79.237 h1
  text "GND" at 62.738,-79.237 h1
  text "A0" at 68.326,-79.237 h1

## Text inside footprints (layer, text, board x,y; h text height)
"DIP 8": Top Overlay "ON" at 68.304,-21.12 h1.02 r90; Top Component Outline "8" at 72.904,-2.91 h1.02 r90; Top Component Outline "7" at 72.904,-5.45 h1.02 r90; Top Component Outline "5" at 72.904,-10.53 h1.02 r90; Top Component Outline "4" at 72.904,-13.07 h1.02 r90; Top Component Outline "3" at 72.904,-15.61 h1.02 r90; Top Component Outline "1" at 72.904,-20.55 h1.02 r90; Top Component Outline "ON" at 68.304,-21.12 h1.02 r90; Top Component Outline "2" at 72.904,-18.15 h1.02 r90; Top Component Outline "6" at 72.904,-7.99 h1.02 r90